# Altium PCB PCB1.PcbDoc
Units mil, origin at the board's own origin, x right, y up, seen from the top; angles counter-clockwise.
Board outline 1200.79 x 1763.78 mil, 2 copper layers (Top Layer, Bottom Layer); 40 components, 32 nets, 106 pads, 0 vias.
Unrouted connection lines stored in the file: 76.
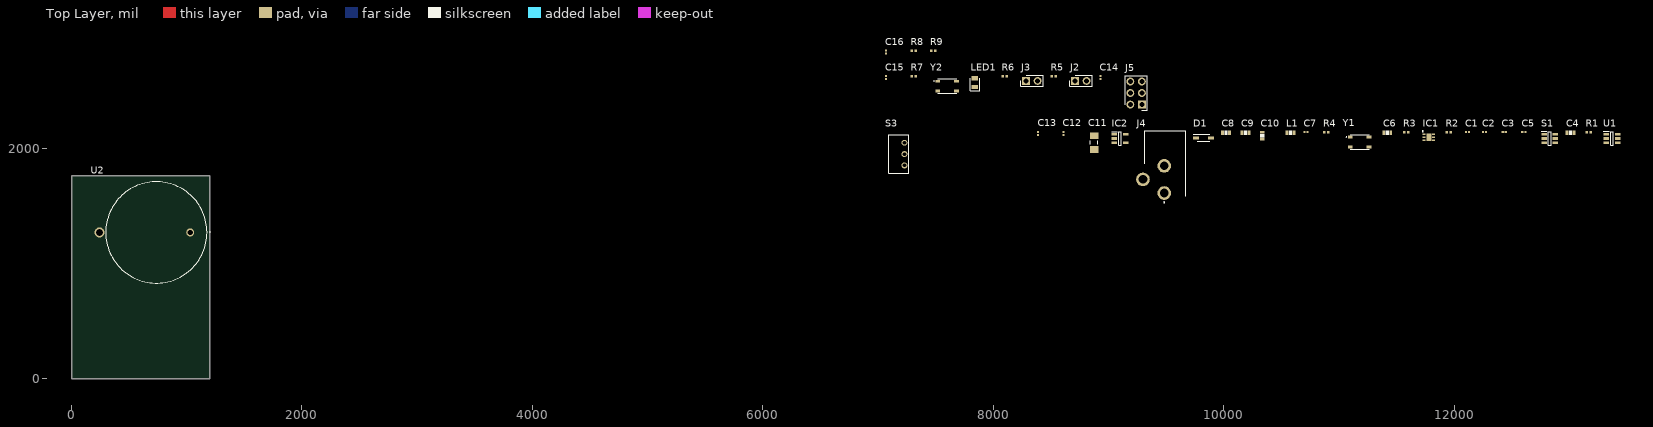
[diagram p0: Top Layer view]
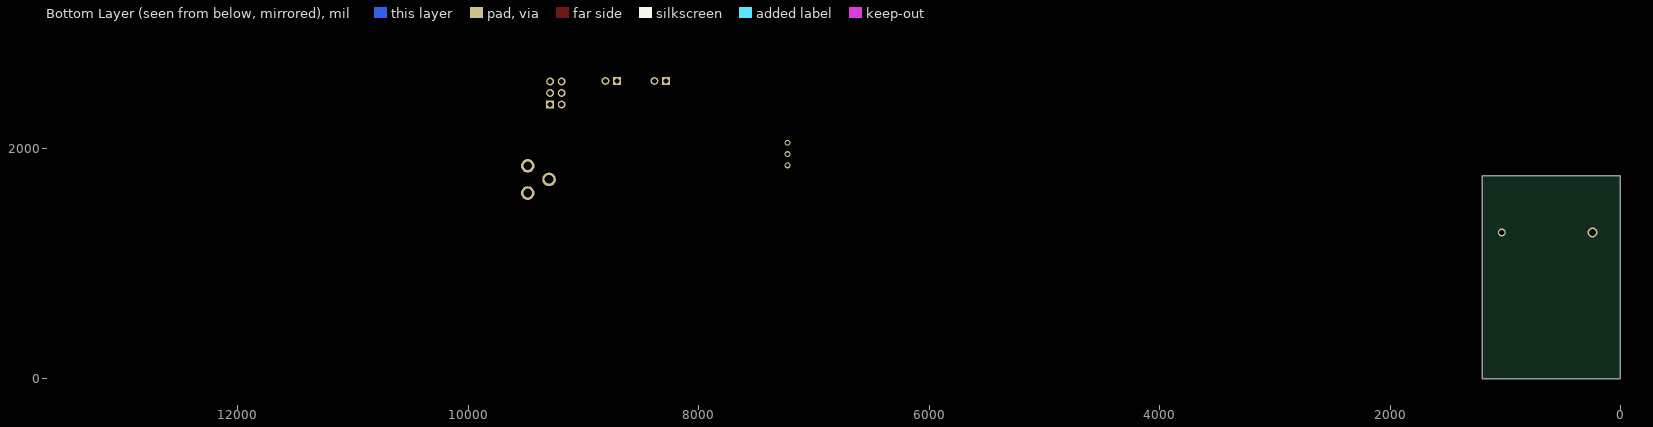
[diagram p1: Bottom Layer view, seen from below]

## Layer stack, top to bottom
Top Solder: solder mask 0.4, Solder Resist, Dk 3.5
Top Layer: signal copper 1.4
Dielectric 1: dielectric 12.6, FR-4, Dk 4.8
Bottom Layer: signal copper 1.4
Bottom Solder: solder mask 0.4, Solder Resist, Dk 3.5

## Board outline
0,0 1200.79,0 1200.79,1763.78 0,1763.78

## Design rules (kind name [scope] priority, off if disabled: settings)
Clearance [All] p1: gap=10 ignorepadtopadclearanceinfootprint=FALSE except(0: Arc-Hole Track-Hole SMDPad-Hole THPad-Hole Via-Hole Fill-Hole Poly-Hole Region-Hole Text-Hole)
PolygonConnect [All] p1: connectstyle=Relief reliefconductorwidth=10 reliefentries=4 polygonreliefangle="90 Angle" airgapwidth=10
RoomDefinition Sheet3 [InComponentClass('Sheet3')] p1: confinementstyle=ConfineIn formatcopy=TRUE lockcomponents=FALSE outline 7045,2800 7570,2800 7570,2970 7045,2970
RoomDefinition Sheet2 [InComponentClass('Sheet2')] p2: confinementstyle=ConfineIn formatcopy=TRUE lockcomponents=FALSE outline 7045,2310 9355,2310 9355,2750 7045,2750
RoomDefinition Sheet1 [InComponentClass('Sheet1')] p3: confinementstyle=ConfineIn formatcopy=TRUE lockcomponents=FALSE outline 7045,1065 13460,1065 13460,2265 7045,2265
RoutingVias [All] p1: holewidth=28 width=50 viastyle="Through Hole" minholewidth=28 minwidth=50 maxholewidth=28 maxwidth=50
SolderMaskExpansion [All] p1: expansion=4
Width [All] p1: maxlimit=10 minlimit=10 preferedwidth=10
30 further rules are at their usual default settings.

## Classes and differential pairs
component class Sheet3: C16 HM1 R8 R9
component class Sheet2: C14 C15 IC3 J2 J3 J5 LED1 R5 R6 R7 U3 Y2 Y3
component class Sheet1: C1 C2 C3 C4 C5 C6 C7 C8 C9 C10 C11 C12 C13 D1 FL1 IC1 IC2 J4 L1 L2 R1 R2 R3 R4 S1 S3 U1 U2 Y1

## Components (designator, comment, footprint, x,y, rotation, side; value= is the part's Value field where it differs from the comment)
C1 "C0402 0.1uF" CAPC0603X33N 12115,2140 r0 top
C2 "C0402 0.1uF" CAPC0603X33N 12265,2140 r0 top
C3 "C0402 0.1uF" CAPC0603X33N 12435,2140 r0 top
C4 "" PASSIVE-CAPACITOR-0603 13010,2135 r0 top value=22uF
C5 "C0402 0.1uF" CAPC0603X33N 12605,2140 r0 top
C6 "Passive-Capacitor (Generic)" PASSIVE-CAPACITOR-0603 11420,2135 r0 top value=22uF
C7 "C0402 0.1uF" CAPC0603X33N 10715,2140 r0 top
C8 "" PASSIVE-CAPACITOR-0603 10020,2135 r0 top value=22uF
C9 "Passive-Capacitor (Generic)" PASSIVE-CAPACITOR-0603 10190,2135 r0 top value=0.1uF
C10 "Passive-Capacitor (Generic)" PASSIVE-CAPACITOR-0603 10335,2110 r90 top value=0.1uF
C11 "1206 10uF" KEMT-1206-2_M 8875,2050 r90 top
C12 "C0402 1uF" CAPC0603X33N 8610,2130 r90 top
C13 "C0402 1uF" CAPC0603X33N 8390,2130 r90 top
C14 "C0402 1uF" CAPC0603X33N 8930,2615 r90 top
C15 "C0402 0.1uF" CAPC0603X33N 7070,2615 r90 top
C16 "C0402 0.1uF" CAPC0603X33N 7070,2835 r90 top
D1 "BAT42W-E3-08" SOD3716X135N 9825,2090 r0 top
IC1 "TPS61291DRVT" SON65P200X200X80-7N 11780,2095 r0 top
IC2 "TLV70233DBVR" SOT95P280X145-5N 9100,2085 r0 top
J2 "87220-2" HDRV2W67P0X254_1X2_467X234X1083P 8710,2585 r0 top
J3 "87220-2" HDRV2W67P0X254_1X2_467X234X1083P 8285,2585 r0 top
J4 "PJ-102A" PJ-102AH 9315,1730 r0 top
J5 "10129381-906002BLF" HDRV6W67P254_2X3_762X483X858P 9290,2380 r90 top
L1 "Passive-Inductor (Generic)" PASSIVE-INDUCTOR-0603 10580,2135 r0 top value=6.8uH
LED1 "LTST-C171GKT" LEDC2012X90N 7840,2570 r90 top
R1 "R0402 1k" RESC1005X40X25NL05T05 13170,2140 r0 top
R2 "R0402 42.9k" RESC1005X40X25NL05T05 11955,2140 r0 top
R3 "R0402 100k" RESC1005X40X25NL05T05 11585,2140 r0 top
R4 "R0402 1k" RESC1005X40X25NL05T05 10890,2140 r0 top
R5 "R0402 220" RESC1005X40X25NL05T05 8525,2625 r0 top
R6 "R0402 100k" RESC1005X40X25NL05T05 8100,2625 r0 top
R7 "R0402 1k" RESC1005X40X25NL05T05 7310,2625 r0 top
R8 "R0402 4.7k" RESC1005X40X25NL05T05 7310,2845 r0 top
R9 "R0402 4.7k" RESC1005X40X25NL05T05 7480,2845 r0 top
S1 "TPS22860DBVR" SOT95P280X145-6N 12830,2085 r0 top
S3 "MHSS1105" MHSS1105 7180,1950 r0 top
U1 "TPL5111DDCR" SOT95P280X110-6N 13370,2085 r0 top
U2 "BS-7" BS7 1030,1270 r180 top
Y1 "PTS810_SJK_250_SMTR_LFS" PTS810SJK250SMTRLFS 11180,2055 r0 top
Y2 "PTS810_SJK_250_SMTR_LFS" PTS810SJK250SMTRLFS 7600,2540 r0 top

## Footprints (in the part's own frame and the unit in brackets; to place one, negate y for a bottom-side part, rotate by r counter-clockwise, add the part's x,y. Pads: shape width x height; smd on the part's side, far side on the other; paste and mask are expansions set on the pad)
BS7 [mm]
  round 1.755 hole 1.17: 1(0,0)
  round 2.25 hole 1.5: 2(20,0)
  silkscreen extent -4.4,-11.17 18.64,11.17, body extent -3.71,-11.17 20.69,11.17, height 8.5
CAPC0603X33N [mm]
  rect 0.47x0.44 smd: 1(-0.335,0) 2(0.335,0)
  body extent -0.3,-0.15 0.3,0.15, height 0.33
HDRV2W67P0X254_1X2_467X234X1083P [mm]
  rect 1.725x1.725 hole 1.15: 1(0,0)
  round 1.725 hole 1.15: 2(2.54,0)
  silkscreen extent -1.21,-1.22 3.75,1.22, body extent -1.06,-1.17 3.6,1.17, height 10.83
HDRV6W67P254_2X3_762X483X858P [mm]
  rect 1.725x1.725 hole 1.15: 1(0,0)
  round 1.725 hole 1.15: 2(0,2.54) 3(2.54,0) 4(2.54,2.54) 5(5.08,0) 6(5.08,2.54)
  silkscreen extent -1.27,-1.14 6.35,3.68, body extent -1.27,-1.14 6.35,3.68, height 8.58
KEMT-1206-2_M [mm] "SMD, 2-Leads, Body 3.4x1.8mm, IPC Low Density"
  rect 1.5x1.9 smd: 1(-1.5,0) 2(1.5,0)
  silkscreen extent -0.35,-0.85 0.35,0.85, body extent -1.7,-0.9 1.7,0.9, height 0.88
LEDC2012X90N [mm]
  rect 0.95x1.4 smd: 1(-0.95,0) 2(0.95,0)
  silkscreen extent -1.78,-1.05 0.95,1.05
MHSS1105 [mm]
  round 1.3 hole 0.8: 1(1.25,2.5) 2(1.25,0) 3(1.25,-2.5)
  silkscreen extent -2.25,-4.25 2.25,4.25, body extent -2.25,-4.25 2.25,4.25, height 4
PASSIVE-CAPACITOR-0603 [mil]
  rect 24x36 smd: 1(-30,0) 2(30,0)
  silkscreen extent -14,-18 14,18, body extent -31,-20 31,20, height 28
PASSIVE-INDUCTOR-0603 [mil]
  rect 24x36 smd: 1(-30,0) 2(30,0)
  silkscreen extent -14,-18 14,18, body extent -31,-18 31,18, height 29
PJ-102AH [mm]
  round 3 hole 1.9: 1(4.3,-3) 2(4.3,3) 3(-0.4,0)
  silkscreen extent 0,-5.17 9,10.72, body extent -0.64,-3.64 8.76,10.76, height 10.85
PTS810SJK250SMTRLFS [mm]
  rect 1.05x0.65 smd: 1(-2.075,1.075) 2(2.075,1.075) 3(-2.075,-1.075) 4(2.075,-1.075)
  silkscreen extent -2.95,-1.6 2.07,1.6, body extent -2.53,-1.6 2.53,1.6, height 2.1
RESC1005X40X25NL05T05 [mm] "Chip Resistor, 2-Leads, Body 1.00x0.50mm, IPC Medium Density"
  rect 0.55x0.55 smd: 1(-0.45,0) 2(0.45,0)
  body extent -0.53,-0.27 0.53,0.28, height 0.4
SOD3716X135N [mm]
  rect 1.25x0.75 smd: 1(-1.65,0) 2(1.65,0)
  silkscreen extent -2.27,-0.77 1.35,0.77, body extent -1.85,-0.77 1.85,0.77, height 1.35
SON65P200X200X80-7N [mm]
  rect 0.6x0.35 smd: 1(-1.05,0.65) 2(-1.05,0) 3(-1.05,-0.65) 4(1.05,-0.65) 5(1.05,0) 6(1.05,0.65)
  rect 1.1x1.7 smd: 7(0,0)
  silkscreen extent -1.47,1.2 -1.22,1.45, body extent -1.05,-1 1.05,1, height 0.8
SOT95P280X110-6N [mm]
  rect 1.25x0.6 smd: 1(-1.25,0.95) 2(-1.25,0) 3(-1.25,-0.95) 4(1.25,-0.95) 5(1.25,0) 6(1.25,0.95)
  silkscreen extent -1.88,-1.45 0.28,1.6, body extent -1.4,-1.45 1.4,1.45, height 1.1
SOT95P280X145-5N [mm]
  rect 1.2x0.6 smd: 1(-1.25,0.95) 2(-1.25,0) 3(-1.25,-0.95) 4(1.25,-0.95) 5(1.25,0.95)
  silkscreen extent -1.85,-1.45 0.3,1.5, body extent -1.4,-1.45 1.4,1.45, height 1.45
SOT95P280X145-6N [mm]
  rect 1.2x0.6 smd: 1(-1.25,0.95) 2(-1.25,0) 3(-1.25,-0.95) 4(1.25,-0.95) 5(1.25,0) 6(1.25,0.95)
  silkscreen extent -1.85,-1.45 0.3,1.6, body extent -1.4,-1.45 1.4,1.45, height 1.45

## Part data
C1 C2 C3 C5 C7 C12 C13 C14 C15 C16: library part 02014D474MAT2A, "Capacitor", Manufacturer_Name=AVX, Mouser Part Number=581-02014D474MAT2A, Datasheet Link=http://www.mouser.com/catalog/supplier/library/pdf/AVXSurfaceMountCeramic.pdf, Height=0.33mm, Manufacturer_Part_Number=02014D474MAT2A, Mouser Price/Stock=https://www.mouser.com/Search/Refine.aspx?Keyword=581-02014D474MAT2A
C4 C8: library part "Passive-Capacitor (Generic)", "Generic Capacitor", Category=Passive, Supplier 1=Mouser, Supplier 2=Digi-Key
C6 C9 C10: "Generic Capacitor", Category=Passive, Supplier 1=Mouser, Supplier 2=Digi-Key
C11: library part CMP-2000-05169-1, "CAP, Ceramic, 0.1 uF, +/- 10%, 50 V, -55 to 125 degC, 1206 (3216 Metric), RoHS, Tape and Reel", Capacitance=0.1µF, Capacitance Tolerance=±10%, Capacitor Case Style=1206[3216Metric], Dielectric Characteristic=X7R, Manufacturer=Kemet, Operating Temperature Max=125degC, Operating Temperature Min=-55degC, Package Description="2-Leads SMD, Body 3.2 x 1.6 mm", Package Reference=1206-2, Voltage Rating=50V, Datasheet URL=https://datasheet.ciiva.com/6125/1725438-6125494.pdf, Datasheet Version=Jul-13, Manufacturer URL=http://www.kemet.com/, Packaging=Tape&Reel, Product Range=KEMET-CSeries, SVHC=ToBeAdvised
D1: "Diode", Manufacturer_Name=Vishay, Mouser Part Number=78-BAT42W-E3-08, RS Part Number=1808601P, Datasheet Link=http://www.vishay.com/docs/85661/bat42w.pdf, Height=1.35mm, Manufacturer_Part_Number=BAT42W-E3-08, Mouser Price/Stock=https://www.mouser.com/Search/Refine.aspx?Keyword=78-BAT42W-E3-08, RS Price/Stock=http://uk.rs-online.com/web/p/products/1808601P
IC1: "Integrated Circuit", Manufacturer_Name="Texas Instruments", Mouser Part Number=595-TPS61291DRVT, RS Part Number=9143112P, Datasheet Link=http://uk.rs-online.com/web/p/products/9143112P, Height=0.8mm, Manufacturer_Part_Number=TPS61291DRVT, Mouser Price/Stock=https://www.mouser.com/Search/Refine.aspx?Keyword=595-TPS61291DRVT, RS Price/Stock=http://uk.rs-online.com/web/p/products/9143112P
IC2: "Integrated Circuit", Manufacturer_Name="Texas Instruments", Mouser Part Number=595-TLV70233DBVR, Datasheet Link=http://www.ti.com/lit/gpn/tlv702, Height=1.45mm, Manufacturer_Part_Number=TLV70233DBVR, Mouser Price/Stock=https://www.mouser.com/Search/Refine.aspx?Keyword=595-TLV70233DBVR
J2 J3: "Connector", Manufacturer_Name="TE Connectivity", Mouser Part Number=571-872202, RS Part Number=7202418P, Allied_Number=70082840, Allied Price/Stock=https://www.alliedelec.com/teconnectivity-87220-2/70082840/, Datasheet Link=https://www.te.com/commerce/DocumentDelivery/DDEController?Action=showdoc&DocId=Customer+Drawing%7F87220%7FK3%7Fpdf%7FEnglish%7FENG_CD_87220_K3.pdf%7F87220-2, Height=10.83mm, Manufacturer_Part_Number=87220-2, Mouser Price/Stock=https://www.mouser.com/Search/Refine.aspx?Keyword=571-872202, RS Price/Stock=http://uk.rs-online.com/web/p/products/7202418P
J4: "Connector", Manufacturer_Name=CUI, Mouser Part Number=490-PJ-102A, Datasheet Link=https://www.cui.com/product/resource/pj-102a.pdf, Manufacturer_Part_Number=PJ-102A, Mouser Price/Stock=https://www.mouser.com/Search/Refine.aspx?Keyword=490-PJ-102A
J5: "Connector", Manufacturer_Name=Amphenol, Mouser Part Number=649-1012938190602BLF, Datasheet Link=https://componentsearchengine.com/Datasheets/1/10129381-906002BLF.pdf, Height=8.58mm, Manufacturer_Part_Number=10129381-906002BLF, Mouser Price/Stock=https://www.mouser.com/Search/Refine.aspx?Keyword=649-1012938190602BLF
L1: "Generic Inductor", Category=Passive, Supplier 1=Mouser, Supplier 2=Digi-Key
LED1: "LED", Manufacturer_Name=Lite-On, Mouser Part Number=859-LTST-C171GKT, RS Part Number=6920935P, Datasheet Link=https://media.digikey.com/pdf/Data%20Sheets/Lite-On%20PDFs/LTST-C171GKT.pdf, Height=0.9mm, Manufacturer_Part_Number=LTST-C171GKT, Mouser Price/Stock=https://www.mouser.com/Search/Refine.aspx?Keyword=859-LTST-C171GKT, RS Price/Stock=http://uk.rs-online.com/web/p/products/6920935P
R1 R2 R3 R4 R5 R6 R7 R8 R9: library part CMP-2002-08135-1, Manufacturer="Vishay Dale", Part Number=CRCW040210K0FKED
S1: "Switch", Manufacturer_Name="Texas Instruments", Mouser Part Number=595-TPS22860DBVR, Datasheet Link=http://www.ti.com/lit/gpn/tps22860, Height=1.45mm, Manufacturer_Part_Number=TPS22860DBVR, Mouser Price/Stock=https://www.mouser.com/Search/Refine.aspx?Keyword=595-TPS22860DBVR
S3: "Switch", Manufacturer_Name=Apem, Mouser Part Number=642-MHSS1105, Datasheet Link=https://componentsearchengine.com/Datasheets/2/MHSS1105.pdf, Height=4mm, Manufacturer_Part_Number=MHSS1105, Mouser Price/Stock=https://www.mouser.com/Search/Refine.aspx?Keyword=642-MHSS1105
U1: "Undefined or Miscellaneous", Manufacturer_Name="Texas Instruments", Mouser Part Number=595-TPL5111DDCR, Datasheet Link=http://www.ti.com/lit/ds/symlink/tpl5111.pdf, Height=1.1mm, Manufacturer_Part_Number=TPL5111DDCR, Mouser Price/Stock=https://www.mouser.com/Search/Refine.aspx?Keyword=595-TPL5111DDCR
U2: "Undefined or Miscellaneous", Manufacturer_Name="MPD (Memory Protection Devices)", Datasheet Link=http://www.memoryprotectiondevices.com/datasheets/BS-7-datasheet.pdf, Height=9mm, Manufacturer_Part_Number=BS-7
Y1 Y2: "Crystal or Oscillator", Manufacturer_Name="C & K COMPONENTS", Manufacturer_Part_Number="PTS810 SJK 250 SMTR LFS", Mouser Part Number=611-PTS810SJK250SMTR, Datasheet Link=https://www.ckswitches.com/media/1476/pts810.pdf, Height=2mm, Mouser Price/Stock=https://www.mouser.com/Search/Refine.aspx?Keyword=611-PTS810SJK250SMTR

## Nets (pads, with @x,y where several pads share a name; then routed paths per layer and width w, separated by ;. In a path a pad name is that pad's centre, name@x,y a point inside that pad or via, vN(x,y) a via of type N, cw(c..) or ccw(c..) an arc to the next point about the centre after c; other vN are vias at no path point)
BTN_1: C15.2 R6.1 Y2.3 Y2.4
DCDC_SW: L1.1
DIO16_TDO: 
DONE: R1.2 U1.4
GND: C1.1 C2.1 C3.1 C4.2 C5.1 C6.1 C7.1 C8.2 C9.1 C10.1 C11.1 C12.1 C13.1 C14.1 C15.1 C16.1 IC1.5 IC1.6 IC1.7 IC2.2 J4.2 J4.3 J5.3 J5.5 LED1.1 R1.1 R2.2 R4.1 R7.1 S1.2 U1.2 U2.1
hot1: 
hot2: 
I2C_SCL: R8.1
I2C_SDA: R9.1
JTAG_TCKC: J5.4
JTAG_TMSC: J5.6
NetC12_2: C12.2 IC2.1 IC2.3 J4.1
NetC14_2: C14.2
NetD1_2: D1.2 U2.2
NetJ2_1: J2.1 R5.2
NetLED1_2: LED1.2 R5.1
NetR2_1: R2.1 U1.3
NetR4_2: R4.2 Y1.1 Y1.2
NetR7_2: R7.2 Y2.1 Y2.2
RESET_N: C7.2 J5.2 R3.1 Y1.3 Y1.4
RF_P_2_4: 
TPL_DRV: IC1.4 S1.6 U1.5
UART_RX: J3.1
UART_TX: J3.2
V_Barrel: C13.2 IC2.5 S3.3
V_L: IC1.1
V_Select: C16.2 J2.2 J5.1 R6.2 R8.2 R9.2 S3.2
V_Switch: S1.1 S3.1
VCC3V3: C6.2 IC1.2 S1.4 S1.5 U1.1 U1.6
VDDR: C8.1 C9.2 C10.2 L1.2
VDDS: C1.2 C2.2 C3.2 C4.1 C5.2 R3.2
Vin: C11.2 D1.1 IC1.3
pads on no net: IC2.4 S1.3

## Silkscreen, mask and mechanical layers (free items; w line width, h text height)
Mechanical 1:
  the board outline again, w10